# Altium PCB Main.PcbDoc
Units mil, origin at the board's own origin, x right, y up, seen from the top; angles counter-clockwise.
Board outline 5000 x 3500 mil, 2 copper layers (Top Layer, Bottom Layer), stack 62.8 mil thick; 27 components, 29 nets, 215 pads, 221 vias.
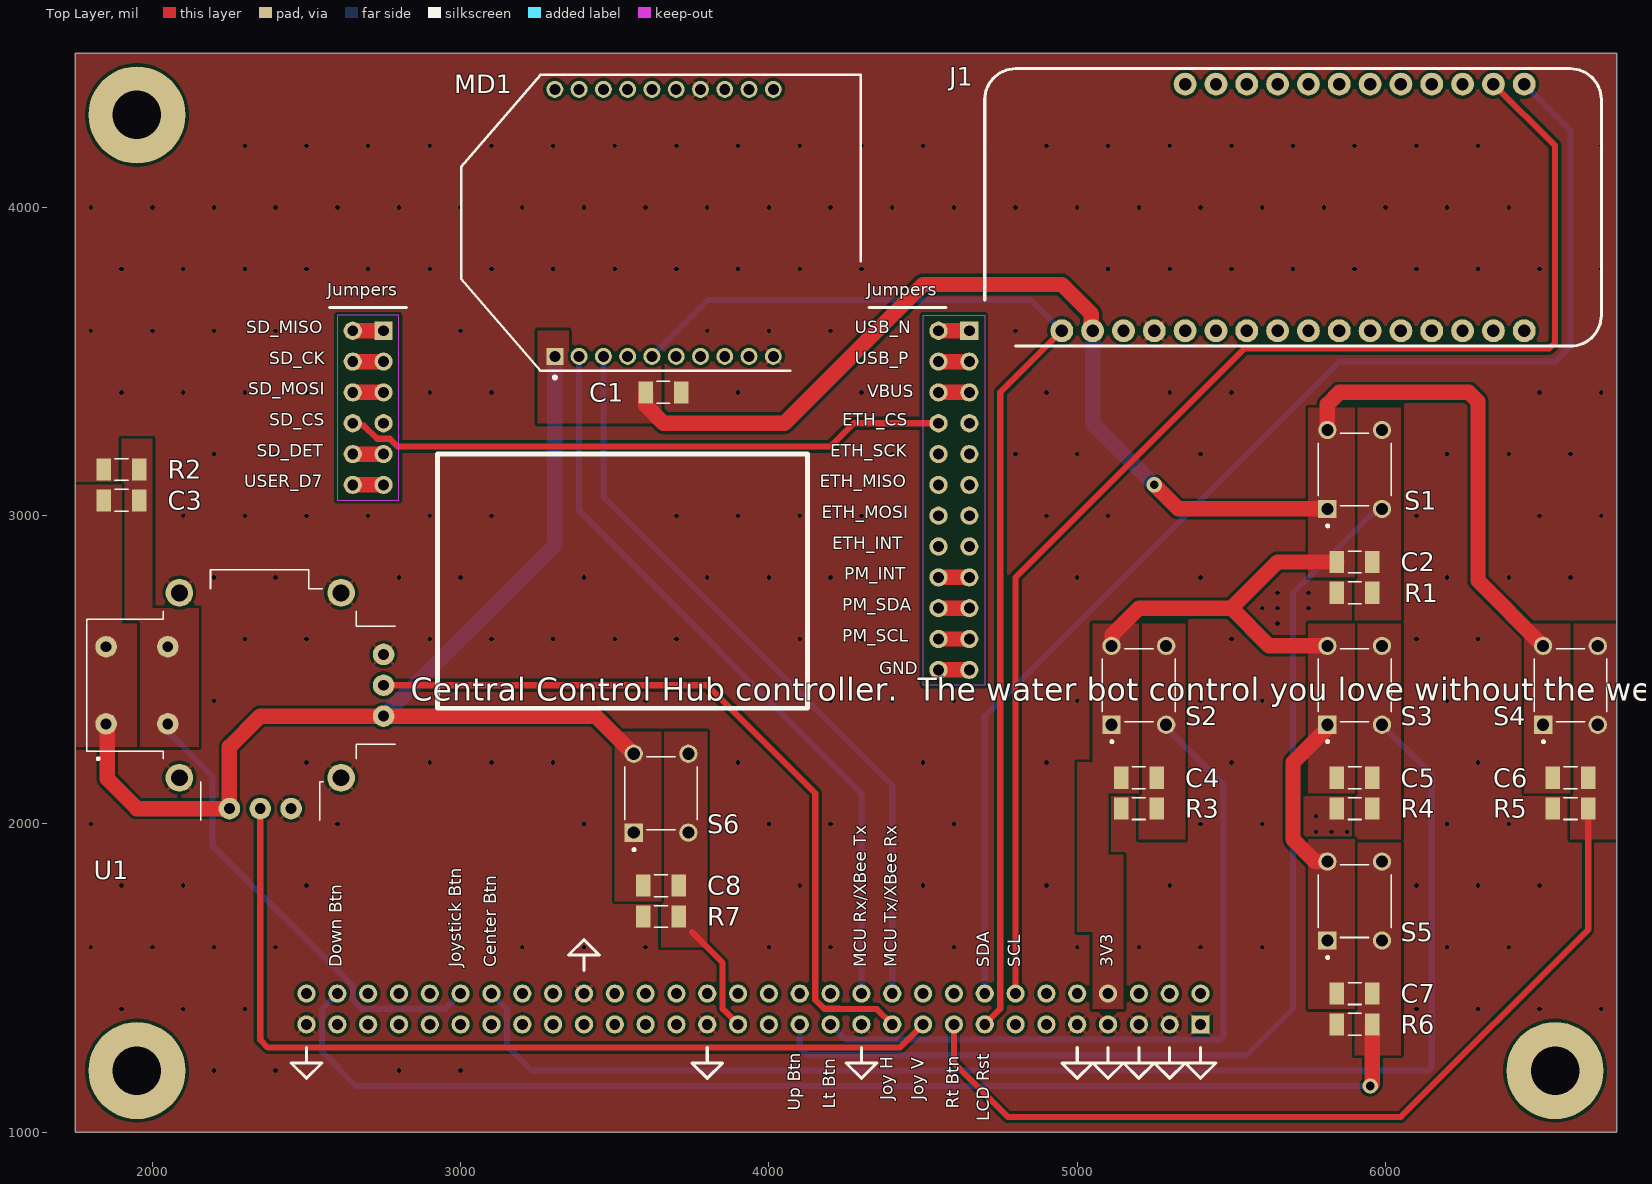
[diagram p0: Top Layer view]
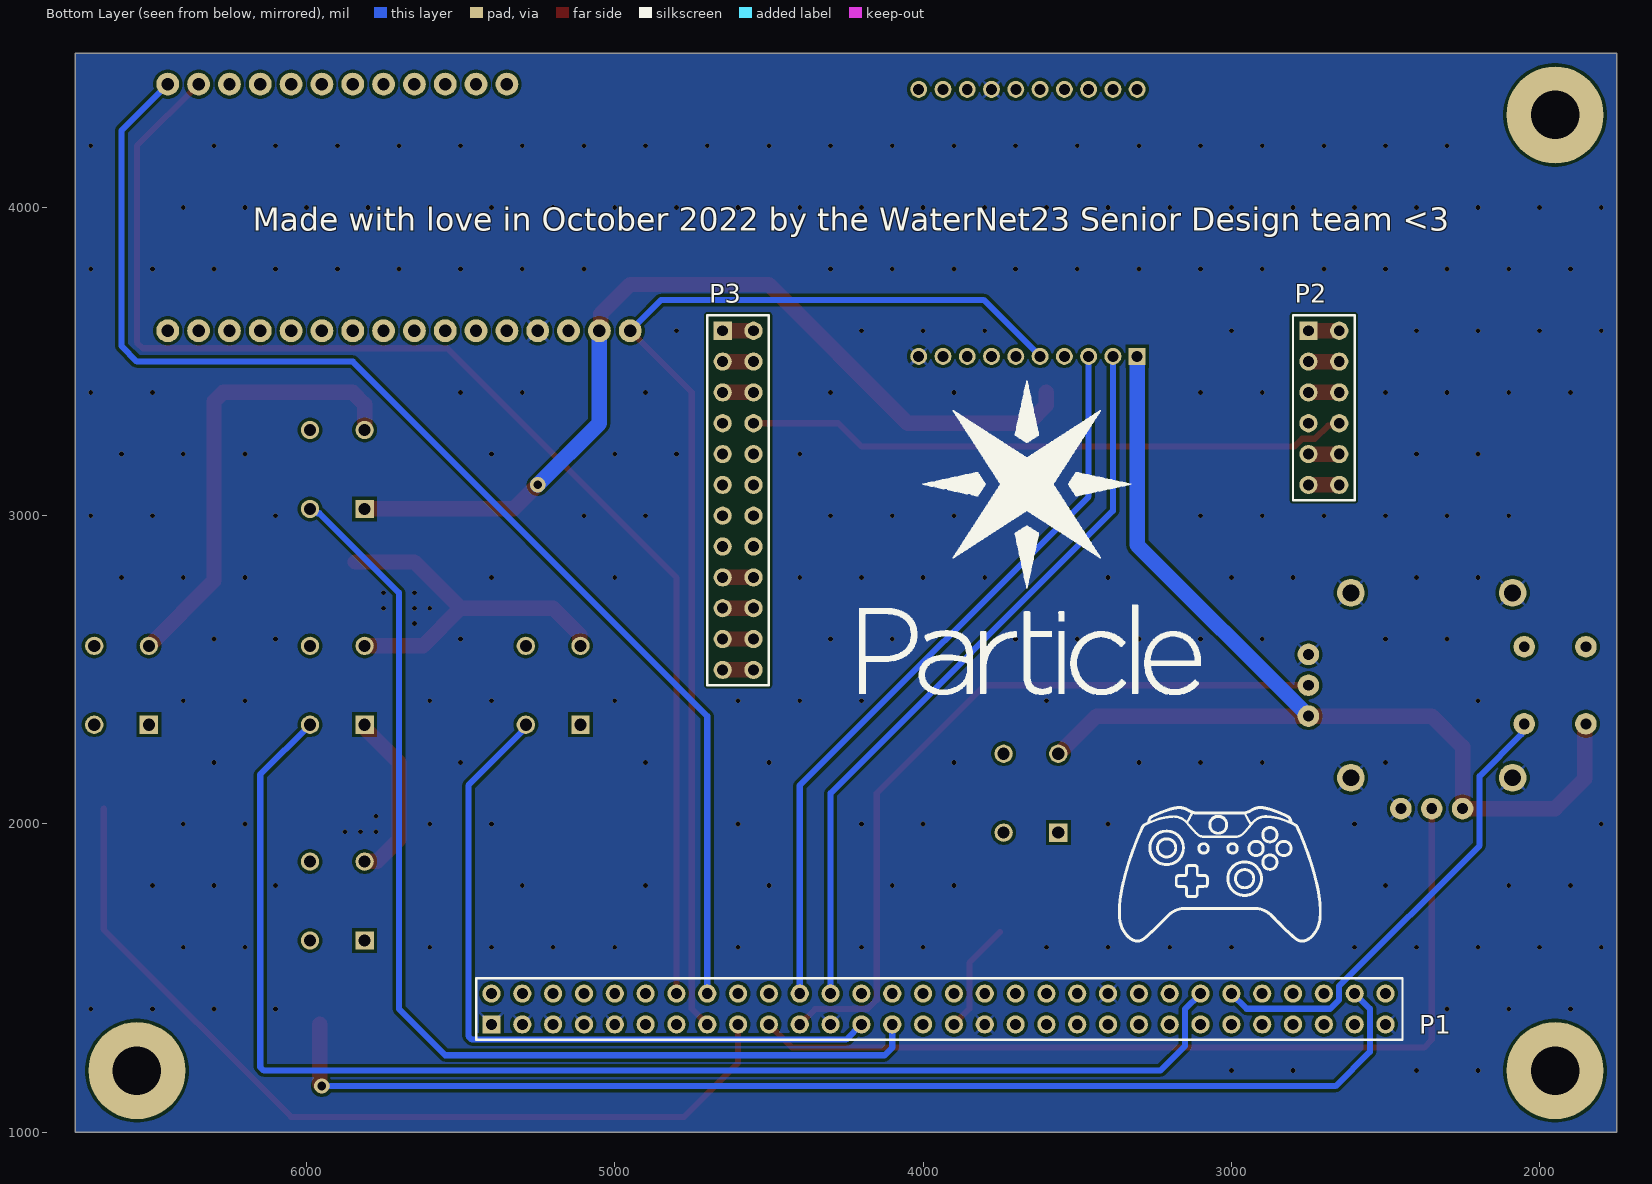
[diagram p1: Bottom Layer view, seen from below]

## Layer stack, top to bottom
Top Solder: solder mask 1, Solder Resist, Dk 3.5
Top Layer: signal copper 1.4
Dielectric 1: dielectric 60, FR-4, Dk 4.8
Bottom Layer: signal copper 1.4
Bottom Solder: solder mask 1, Solder Resist, Dk 3.5

## Board outline
1750,1000 1750,4500 6750,4500 6750,1000

## Design rules (kind name [scope] priority, off if disabled: settings)
Clearance [All] p1: gap=10 ignorepadtopadclearanceinfootprint=FALSE
Height [All] p1: minheight=0 maxheight=2000 prefheight=500
HoleSize [All] p1: absolutevalues=TRUE maxlimit=248.03 minlimit=7.87 maxpercent=80.000 minpercent=20.000
HoleToHoleClearance [All] p1: gap=19.68 allowstackedmicrovias=TRUE
PolygonConnect PolygonConnect_1 [InNet('GND')] p1: thpad.connectstyle=Relief thpad.reliefconductorwidth=10 thpad.reliefentries=4 thpad.polygonreliefangle="45 Angle" thpad.airgapwidth=10 smdpad.connectstyle=Direct smdpad.reliefconductorwidth=20 smdpad.reliefentries=4 smdpad.polygonreliefangle="45 Angle" smdpad.airgapwidth=10 via.connectstyle=Direct via.reliefconductorwidth=20 via.reliefentries=4 via.polygonreliefangle="45 Angle" via.airgapwidth=10
PolygonConnect [All] p2: connectstyle=Direct reliefconductorwidth=20 reliefentries=4 polygonreliefangle="45 Angle" airgapwidth=10
RoutingVias [All] p1: holewidth=15.75 width=50 viastyle="Through Hole" minholewidth=7.87 minwidth=5.12 maxholewidth=248.03 maxwidth=393.7
SilkToSilkClearance [All] p1: silktosilkclearance=6
SilkToSolderMaskClearance [IsPad] p1: minsilkscreentomaskgap=6 clearancetoexposedcopper=TRUE
SolderMaskExpansion [All] p1: expansion=4 istentingtop=FALSE
Width [All] p1: maxlimit=100 minlimit=10 preferedwidth=20
25 further rules are at their usual default settings.

## Components (designator, comment, footprint, x,y, rotation, side; value= is the part's Value field where it differs from the comment)
C1 "Capacitor" "1206 Capacitor" 3657.48,3400 r180 top value=1uF
C2 "Capacitor" "1206 Capacitor" 5900,2850 r180 top value=1uF
C3 "Capacitor" "1206 Capacitor" 1900,3050 r180 top value=1uF
C4 "Capacitor" "1206 Capacitor" 5200,2150 r180 top value=1uF
C5 "Capacitor" "1206 Capacitor" 5900,2150 r180 top value=1uF
C6 "Capacitor" "1206 Capacitor" 6600,2150 r180 top value=1uF
C7 "Capacitor" "1206 Capacitor" 5900,1450 r180 top value=1uF
C8 "Capacitor" "1206 Capacitor" 3650,1800 r180 top value=1uF
J1 "Feather_Header" Feather_OLED 5700,4000 r0 top
MD1 "XBP9B-DMUTB002" FP-XBP9B-DMUTB002-MFG 3650,3950 r90 top
P1 "B-Series SOM Connector" HDR2X30 5400,1350 r180 bottom
P2 "Left Header" HDR2X6 2750,3600 r270 bottom
P3 "Right Header" HDR2X12 4650,3600 r270 bottom
R1 "Resistor" "1206 Resistor" 5900,2750 r0 top value=10k
R2 "Resistor" "1206 Resistor" 1900,3150 r0 top value=10k
R3 "Resistor" "1206 Resistor" 5200,2050 r0 top value=10k
R4 "Resistor" "1206 Resistor" 5900,2050 r0 top value=10k
R5 "Resistor" "1206 Resistor" 6600,2050 r0 top value=10k
R6 "Resistor" "1206 Resistor" 5900,1350 r0 top value=10k
R7 "Resistor" "1206 Resistor" 3650,1700 r0 top value=10k
S1 "Button" "Makerspace Button" 5900,3150 r90 top
S2 "Button" "Makerspace Button" 5200,2450 r90 top
S3 "Button" "Makerspace Button" 5900,2450 r90 top
S4 "Button" "Makerspace Button" 6600,2450 r90 top
S5 "Button" "Makerspace Button" 5900,1750 r90 top
S6 "Button" "Makerspace Button" 3650,2100 r90 top
U1 "Joystick" XDCR_COM-09032 2350,2450 r90 top locked

## Footprints (in the part's own frame and the unit in brackets; to place one, negate y for a bottom-side part, rotate by r counter-clockwise, add the part's x,y. Pads: shape width x height; smd on the part's side, far side on the other; paste and mask are expansions set on the pad)
"1206 Capacitor" [mm]
  rect 1.2x1.82 smd: 1(-1.46,0) 2(1.46,0)
  silkscreen extent -0.54,-0.9 0.54,0.9, body extent -1.6,-0.9 1.6,0.9, height 1.61
"1206 Resistor" [mm]
  rect 1.2x1.82 smd: 1(-1.46,0) 2(1.46,0)
  silkscreen extent -0.54,-0.9 0.54,0.9, body extent -1.55,-0.77 1.55,0.77, height 0.56
Feather_OLED [mil]
  round 74 hole 40: 1(-750,-400) 2(-650,-400) 3(-550,-400) 4(-450,-400) 5(-350,-400) 6(-250,-400) 7(-150,-400) 8(-50,-400) 9(50,-400) 10(150,-400) 11(250,-400) 12(350,-400) 13(450,-400) 14(550,-400) 15(650,-400) 16(750,-400) 17(750,400) 18(650,400) 19(550,400) 20(450,400) 21(350,400) 22(250,400) 23(150,400) 24(50,400) 25(-50,400) 26(-150,400) 27(-250,400) 28(-350,400)
  silkscreen extent -1000,-450 1000,450, body extent -1000,-450 1000,450, height 572
FP-XBP9B-DMUTB002-MFG [mm]
  rect 1.4x1.4 hole 0.9 paste-1000 mask+0: 1(-11,8.75)
  round 1.4 hole 0.9 paste-1000 mask+0: 2(-11,6.75) 3(-11,4.75) 4(-11,2.75) 5(-11,0.75) 6(-11,-1.25) 7(-11,-3.25) 8(-11,-5.25) 9(-11,-7.25) 10(-11,-9.25) 11(11,-9.25) 12(11,-7.25) 13(11,-5.25) 14(11,-3.25) 15(11,-1.25) 16(11,0.75) 17(11,2.75) 18(11,4.75) 19(11,6.75) 20(11,8.75)
  silkscreen extent -12.86,-16.47 12.19,16.47, body extent -12.29,-16.57 12.29,16.57, height 0.25
HDR2X6 [mm] "Connector; Header; 6x2 Position"
  rect 1.5x1.5 hole 0.9: 1(0,0)
  round 1.5 hole 0.9: 2(0,2.54) 3(2.54,0) 4(2.54,2.54) 5(5.08,0) 6(5.08,2.54) 7(7.62,0) 8(7.62,2.54) 9(10.16,0) 10(10.16,2.54) 11(12.7,0) 12(12.7,2.54)
  silkscreen extent -1.27,-1.27 13.97,3.81, body extent -1.52,-1.27 14.22,3.81, height 8.52
HDR2X12 [mm] "Connector; Header; 12x2 Position"
  rect 1.5x1.5 hole 0.9: 1(0,0)
  round 1.5 hole 0.9: 2(0,2.54) 3(2.54,0) 4(2.54,2.54) 5(5.08,0) 6(5.08,2.54) 7(7.62,0) 8(7.62,2.54) 9(10.16,0) 10(10.16,2.54) 11(12.7,0) 12(12.7,2.54) 13(15.24,0) 14(15.24,2.54) 15(17.78,0) 16(17.78,2.54) 17(20.32,0) 18(20.32,2.54) 19(22.86,0) 20(22.86,2.54) 21(25.4,0) 22(25.4,2.54) 23(27.94,0) 24(27.94,2.54)
  silkscreen extent -1.27,-1.27 29.21,3.81, body extent -1.52,-1.27 29.46,3.81, height 8.52
HDR2X30 [mm] "Connector; Header; 30x2 Position"
  rect 1.5x1.5 hole 0.9: 1(0,0)
  round 1.5 hole 0.9: 2(0,2.54) 3(2.54,0) 4(2.54,2.54) 5(5.08,0) 6(5.08,2.54) 7(7.62,0) 8(7.62,2.54) 9(10.16,0) 10(10.16,2.54) 11(12.7,0) 12(12.7,2.54) 13(15.24,0) 14(15.24,2.54) 15(17.78,0) 16(17.78,2.54) 17(20.32,0) 18(20.32,2.54) 19(22.86,0) 20(22.86,2.54) 21(25.4,0) 22(25.4,2.54) 23(27.94,0) 24(27.94,2.54) 25(30.48,0) 26(30.48,2.54) 27(33.02,0) 28(33.02,2.54) 29(35.56,0) 30(35.56,2.54) 31(38.1,0) 32(38.1,2.54) 33(40.64,0) 34(40.64,2.54) 35(43.18,0) 36(43.18,2.54) 37(45.72,0) 38(45.72,2.54) 39(48.26,0) 40(48.26,2.54) 41(50.8,0) 42(50.8,2.54) 43(53.34,0) 44(53.34,2.54) 45(55.88,0) 46(55.88,2.54) 47(58.42,0) 48(58.42,2.54) 49(60.96,0) 50(60.96,2.54) 51(63.5,0) 52(63.5,2.54) 53(66.04,0) 54(66.04,2.54) 55(68.58,0) 56(68.58,2.54) 57(71.12,0) 58(71.12,2.54) 59(73.66,0) 60(73.66,2.54)
  silkscreen extent -1.27,-1.27 75.06,3.81, body extent -1.27,-1.27 74.93,3.81, height 8.33
"Makerspace Button" [mm]
  rect 1.508x1.508 hole 1: 1(-3.25,2.25)
  round 1.508 hole 1: 2(3.25,2.25) 3(-3.25,-2.25) 4(3.25,-2.25)
  silkscreen extent -4.75,-3 3,3, body extent -5.5,-4.2 5.5,4.2, height 4.9
XDCR_COM-09032 [mil]
  round 70 hole 35.43: B1A(-125,500) B1A(125,500) B2A(-125,300) B2A(125,300)
  round 70 hole 35: H1(-100,-400) H2(0,-400) H3(100,-400) V1(-400,100) V2(-400,0) V3(-400,-100)
  round 90 hole 55: S1(-300,262.5) S2(-300,-262.5) S3(300,-262.5) S4(300,262.5)
  silkscreen extent -437,-437 374,563, body extent -525,-523 525,564, height 1191

## Part data
MD1: library part CMP-84319-000004-1, "RX TXRX MOD ISM < 1GHZ U.FL TH", Case/Package=Module, Current - Receiving=29mA, Current - Transmitting=215mA, Frequency=900MHz, Max Frequency=928MHz, Max Operating Temperature=85°C, Max Supply Voltage=3.6V, Min Frequency=902MHz, Min Operating Temperature=-40°C, Min Supply Voltage=2.4V, Output Power (dBm)=24dBm, Package Quantity=1, Data Rate=200Kbps, Interface=SPI, Memory Size=2KB, Number of Pins=20, Packaging=Bulk, Radiation Hardening=No, RAM Size=2KB, Sensitivity=-101dBm, Series=XBee-Pro™
P1: library part "Header 30X2", "Header, 30-Pin, Dual row", LatestRevisionDate=17-Jul-2002, LatestRevisionNote="Re-released for DXP Platform.", Publisher="Altium Limited"
P2: library part "Header 6X2", "Header, 6-Pin, Dual row", LatestRevisionDate=17-Jul-2002, LatestRevisionNote="Re-released for DXP Platform.", Publisher="Altium Limited"
P3: library part "Header 12X2", "Header, 12-Pin, Dual row", LatestRevisionDate=17-Jul-2002, LatestRevisionNote="Re-released for DXP Platform.", Publisher="Altium Limited"
S1 S2 S3 S4 S5 S6: library part TS02-66-170-BK-260-SCR-D, "6 x 6 mm, 17 mm Actuator Height, 260 gf, Black, Short Crimped, Through Hole, SPST, Tactile Switch", Package=None, Availability="In Stock", CUI_purchase_URL=https://www.cuidevices.com/product/switches/tactile-switches/ts02-series?utm_source=snapeda.com&utm_medium=referral&utm_campaign=snapedaBOM, MF="CUI Devices", MP=TS02-66-170-BK-260-SCR-D, Price=None, Purchase-URL=https://pricing.snapeda.com/search/part/TS02-66-170-BK-260-SCR-D/?ref=eda
U1: library part COM-09032, "Thumb Joystick", Package=None, Availability=Unavailable, MP=COM-09032, Price=None
C1 C2 C3 C4 C5 C6 C7 C8: SimulationGenericComponent=True
R1 R2 R3 R4 R5 R6 R7: SimulationGenericComponent=True, TC1=0, TC2=0

## Free pads (board coordinates)
  round 314.96 hole 157.48: MECH(1950,1200) MECH(1950,4300) MECH(6550,1200)

## Via types
v1: diameter 15.75, hole 15.75, Top Layer to Bottom Layer, 219 vias
v2: diameter 50, hole 28, Top Layer to Bottom Layer, 2 vias

## Nets (pads, with @x,y where several pads share a name; then routed paths per layer and width w, separated by ;. In a path a pad name is that pad's centre, name@x,y a point inside that pad or via, vN(x,y) a via of type N, cw(c..) or ccw(c..) an arc to the next point about the centre after c; other vN are vias at no path point)
3V3: C1.2 C2.2 C3.2 C4.2 C5.2 C6.2 C7.2 C8.2 J1.2 MD1.1 P1.8 S1.1 S1.2 S2.1 S2.2 S3.1 S3.2 S4.1 S4.2 S5.1 S5.2 S6.1 S6.2 U1.B1A U1.H1 U1.V1 | length 9852.3
  Top Layer w50: U1.B1A@1850,2325 1853.83,2321.17 1853.83,2146.17 1950,2050 U1.V1 2250,2250 2350,2350 3436.83,2350 3558.88,2227.95 S6.2 ; C1.2 3600,3358.46 3658.46,3300 4050,3300 4500,3750 4950,3750 5045.8,3654.2 5045.8,3604.2 J1.2 ; S2.2 5113.21,2579.75 5113.21,2613.21 5200,2700 5500,2700 ; v2(5250,3100) 5327.95,3022.05 S1.1 ; S5.2 5809.62,1879.75 5770.25,1879.75 5700,1950 5700,2200 5806.73,2306.73 5806.73,2317.36 S3.1 ; S3.2 5622.05,2577.95 5500,2700 ; S1.2 5811.42,3361.42 5850,3400 6270.71,3400 6300,3370.71 6300,2789.37 S4.2 ; C2.2 5650,2850 5500,2700
  Bottom Layer w50: U1.H1 3305.51,2905.51 MD1.1 ; J1.2 5050,3300 v2(5250,3100)
A0/Feather_RST_n: J1.1 MD1.5 P1.15 | length 3804.1
  Top Layer w20: P1.15 4750.47,1400.47 4750.47,3400.47 J1.1
  Bottom Layer w20: MD1.5@3620.47,3520.73 MD1.5 3803.54,3700 4850,3700 J1.1
A1/Right_Button: C6.1 P1.17 R5.2 S4.3 S4.4 | length 2899.1
  Top Layer w20: P1.17 4600,1225 4775,1050 6050,1050 6657.48,1657.48 R5.2
A2/Joystick_Vert: P1.19 U1.V2 | length 2941.4
  Top Layer w20: U1.V2 2350,1300 2375,1275 4425,1275 P1.19
A3/Joystick_Horiz: P1.21 U1.H2 | length 2498.1
  Top Layer w20: U1.H2 3800,2450 4150.47,2099.53 4150.47,1429.48 4179.48,1400.47 4227.5,1400.47 4228.44,1399.53 4350.47,1399.53 P1.21
A4/Left_Button: C4.1 P1.25 R3.2 S2.3 S2.4 | length 2387.4
  Bottom Layer w20: P1.25 4249.53,1300.47 5463.28,1300.47 5475,1312.19 5475,2125 5288.58,2311.42 S2.3
A5/Up_Button: C2.1 P1.27 R1.2 S1.3 S1.4 | length 3498.8
  Bottom Layer w20: P1.27 4100,1275 4125,1250 5550,1250 5700.43,1400.43 5700.43,2750.43 5958.11,3008.11 5963.99,3008.11 5977.93,3022.05 S1.3
A7/Stop_Button: C8.1 P1.31 R7.2 S6.3 S6.4 | length 362.1
  Top Layer w20: 3750,1650 3849.53,1550.47 3849.53,1400.47 P1.31
D7/Down_Button: C7.1 P1.58 R6.2 S5.3 S5.4 | length 3858
  Top Layer w50: v2(5950,1150) 5957.48,1157.48 R6.2
  Bottom Layer w20: P1.58 2550.47,1400.47 2550.47,1261.24 2661.72,1150 v2(5950,1150)
D22/Center_Button: C5.1 P1.48 R4.2 S3.3 S3.4 | length 4405.9
  Bottom Layer w20: P1.48 3150.47,1399.53 3150.47,1279.48 3229.96,1200 6138.28,1200 6150,1211.72 6150,2160.63 S3.3
D23/Joystick_Button: C3.1 P1.50 R2.2 U1.B2A | length 1526.3
  Bottom Layer w20: U1.B2A@2050,2325 2059.57,2315.43 2059.57,2290.43 2195,2155 2195,1930 2650.47,1474.53 2650.47,1429.48 2679.49,1400.47 2950.47,1400.47 P1.50
GND: C1.1 J1.4 MD1.10 MD1.14 P1.1 P1.3 P1.5 P1.7 P1.9 P1.23 P1.33 P1.42 P1.59 R1.1 R2.1 R3.1 R4.1 R5.1 R6.1 R7.1 U1.H3 U1.S1 U1.S2 U1.S3 U1.S4 U1.V3
  other v1: 2200,1200 2400,1200 2800,1200 3000,1200 1900,1400 2100,1400 2300,1400 6100,1400 6300,1400 6500,1400 6700,1400 1800,1600 2000,1600 2200,1600 2400,1600 2600,1600 3000,1600 3200,1600 3400,1600 3600,1600 4000,1600 4200,1600 4600,1600 5000,1600 5200,1600 5400,1600 5600,1600 6200,1600 6400,1600 1900,1800 2100,1800 2500,1800 3900,1800 4100,1800 4500,1800 4900,1800 5300,1800 6100,1800 6300,1800 6500,1800 5775,1975 5825,1975 5875,1975 1800,2000 2600,2000 3400,2000 4000,2000 4200,2000 4600,2000 5400,2000 5600,2000 6200,2000 6400,2000 5775,2025 2500,2200 2900,2200 3100,2200 3300,2200 3900,2200 4500,2200 4900,2200 5500,2200 6300,2200 2200,2400 3600,2400 4200,2400 4400,2400 4600,2400 5000,2400 5400,2400 5600,2400 6200,2400 6400,2400 2300,2600 2500,2600 2900,2600 3100,2600 3300,2600 3500,2600 3700,2600 4100,2600 4300,2600 5500,2600 6100,2600 6300,2600 5650,2650 5600,2700 5650,2700 5750,2700 5650,2750 5750,2750 2200,2800 2400,2800 2800,2800 3000,2800 3400,2800 3800,2800 4000,2800 4200,2800 4400,2800 5000,2800 5400,2800 6200,2800 6400,2800 6600,2800 2100,3000 2300,3000 2500,3000 2700,3000 2900,3000 3100,3000 3700,3000 3900,3000 4100,3000 4300,3000 4900,3000 5100,3000 6100,3000 6500,3000 6700,3000 2200,3200 2400,3200 4400,3200 4800,3200 5000,3200 5400,3200 6200,3200 6400,3200 6600,3200 1900,3400 2100,3400 2300,3400 2500,3400 2900,3400 3100,3400 3900,3400 4300,3400 4900,3400 5300,3400 5500,3400 6500,3400 6700,3400 1800,3600 2000,3600 2200,3600 2400,3600 3000,3600 3800,3600 4000,3600 4200,3600 4800,3600 1900,3800 2100,3800 2300,3800 2500,3800 2700,3800 2900,3800 3100,3800 3300,3800 3500,3800 3700,3800 3900,3800 4100,3800 4300,3800 5100,3800 5300,3800 5500,3800 5700,3800 5900,3800 6100,3800 6300,3800 6500,3800 6700,3800 1800,4000 2000,4000 2200,4000 2400,4000 2600,4000 2800,4000 3000,4000 3200,4000 3400,4000 3600,4000 3800,4000 4000,4000 4200,4000 4400,4000 4600,4000 4800,4000 5000,4000 5200,4000 5400,4000 5600,4000 5800,4000 6000,4000 6200,4000 6400,4000 2300,4200 2500,4200 2700,4200 2900,4200 3100,4200 3300,4200 3500,4200 3700,4200 3900,4200 4100,4200 4300,4200 4500,4200 4700,4200 4900,4200 5100,4200 5300,4200 5500,4200 5700,4200 5900,4200 6100,4200 6300,4200 6700,4200
MCU_Rx: MD1.2 P1.24 | length 2446.2
  Bottom Layer w20: MD1.2 3384.25,3015.75 4300,2100 P1.24
MCU_Tx: MD1.3 P1.22 | length 2455.1
  Bottom Layer w20: MD1.3 3462.99,3062.01 4400,2125 P1.22
NetP2_1: P2.1 P2.2 | length 100
  Top Layer w50: P2.2 P2.1
NetP2_3: P2.3 P2.4 | length 100
  Top Layer w50: P2.4 P2.3
NetP2_5: P2.5 P2.6 | length 100
  Top Layer w50: P2.6 P2.5
NetP2_8: P2.8 P3.8 | length 1962.1
  Top Layer w20: P2.8 2657.47,3292.53 2686.49,3292.53 2729.49,3249.53 2770.51,3249.53 2795.04,3225 4200,3225 4275,3300 P3.8
NetP2_9: P2.9 P2.10 | length 100
  Top Layer w50: P2.10 P2.9
NetP2_11: P2.11 P2.12 | length 100
  Top Layer w50: P2.12 P2.11
NetP3_1: P3.1 P3.2 | length 100
  Top Layer w50: P3.2 P3.1
NetP3_3: P3.3 P3.4 | length 100
  Top Layer w50: P3.4 P3.3
NetP3_5: P3.5 P3.6 | length 100
  Top Layer w50: P3.6 P3.5
NetP3_17: P3.17 P3.18 | length 100
  Top Layer w50: P3.18 P3.17
NetP3_19: P3.19 P3.20 | length 100
  Top Layer w50: P3.20 P3.19
NetP3_21: P3.21 P3.22 | length 100
  Top Layer w50: P3.22 P3.21
NetP3_23: P3.23 P3.24 | length 100
  Top Layer w50: P3.24 P3.23
SCL: J1.18 P1.14 | length 4336.6
  Top Layer w20: P1.14 4800,2800 5543,3543 6531.28,3543 6550,3561.72 6550,4200 J1.18
SDA: J1.17 P1.16 | length 4209.2
  Bottom Layer w20: P1.16 4700,2350 5850,3500 6550,3500 6600,3550 6600,4250 J1.17
pads on no net: J1.3 J1.5 J1.6 J1.7 J1.8 J1.9 J1.10 J1.11 J1.12 J1.13 J1.14 J1.15 J1.16 J1.19 J1.20 J1.21 J1.22 J1.23 J1.24 J1.25 J1.26 J1.27 J1.28 MD1.4 MD1.6 MD1.7 MD1.8 MD1.9 MD1.11 MD1.12 MD1.13 MD1.15 MD1.16 MD1.17 MD1.18 MD1.19 MD1.20 P1.2 P1.4 P1.6 P1.10 P1.11 P1.12 P1.13 P1.18 P1.20 P1.26 P1.28 P1.29 P1.30 P1.32 P1.34 P1.35 P1.36 P1.37 P1.38 P1.39 P1.40 P1.41 P1.43 P1.44 P1.45 P1.46 P1.47 P1.49 P1.51 P1.52 P1.53 P1.54 P1.55 P1.56 P1.57 P1.60 P2.7 P3.7 P3.9 P3.10 P3.11 P3.12 P3.13 P3.14 P3.15 P3.16

## Polygon pours and split planes (outlines as drawn)
GND on Top Layer "GND_L01_P021" (solid, pour order 21): 6750,4500 1750,4500 1750,1000 6750,1000
3V3 on Top Layer "3V3_L01_P000" (solid, pour order 0): 3650,2300 3500,2300 3500,1750 3650,1750
A7/Stop_Button on Top Layer "A7/STOP_BUTTON_L01_P001" (solid, pour order 1): 3800,2300 3650,2300 3650,1600 3800,1600
3V3 on Top Layer "3V3_L01_P020" (solid, pour order 20): 5050,1400 5150,1400 5150,1900 5100,1900 5100,2200 5000,2200 5000,1650 5050,1650
3V3 on Top Layer "3V3_L01_P016" (solid, pour order 16): 3650,3300 3650,3500 3350,3500 3350,3600 3250,3600 3250,3300
3V3 on Top Layer "3V3_L01_P003" (solid, pour order 3): 5900,2650 5750,2650 5750,2100 5900,2100
3V3 on Top Layer "3V3_L01_P002" (solid, pour order 2): 5200,2650 5050,2650 5050,2100 5200,2100
D23/Joystick_Button on Top Layer "D23/JOYSTICK_BUTTON_L01_P019" (solid, pour order 19): 1950,2250 2150,2250 2150,2700 2000,2700 2000,3250 1900,3250 1900,2675 1925,2650 1950,2650
3V3 on Top Layer "3V3_L01_P017" (solid, pour order 17): 1950,2250 1950,2650 1900,2650 1900,3100 1750,3100 1750,2250
3V3 on Top Layer "3V3_L01_P005" (solid, pour order 5): 6600,2650 6450,2650 6450,2100 6600,2100
3V3 on Top Layer "3V3_L01_P004" (solid, pour order 4): 5900,1950 5750,1950 5750,1400 5900,1400
3V3 on Top Layer "3V3_L01_P006" (solid, pour order 6): 5900,3350 5750,3350 5750,2800 5900,2800
A5/Up_Button on Top Layer "A5/UP_BUTTON_L01_P015" (solid, pour order 15): 6050,3350 5900,3350 5900,2650 6050,2650
D7/Down_Button on Top Layer "D7/DOWN_BUTTON_L01_P012" (solid, pour order 12): 6050,1950 5900,1950 5900,1250 6050,1250
A1/Right_Button on Top Layer "A1/RIGHT_BUTTON_L01_P009" (solid, pour order 9): 6750,2650 6600,2650 6600,1950 6750,1950
D22/Center_Button on Top Layer "D22/CENTER_BUTTON_L01_P008" (solid, pour order 8): 6050,2650 5900,2650 5900,1950 6050,1950
A4/Left_Button on Top Layer "A4/LEFT_BUTTON_L01_P007" (solid, pour order 7): 5350,2650 5200,2650 5200,1950 5350,1950
GND on Bottom Layer "GND_L02_P018" (solid, pour order 18): 6750,4500 1750,4500 1750,1000 6750,1000

## Keep-outs
Keep-Out Layer:
  region: 4500,3650 4700,3650 4700,2450 4500,2450
  region: 2800,3050 2800,3650 2600,3650 2600,3050

## Silkscreen, mask and mechanical layers (free items; w line width, h text height)
Top Overlay:
  lines w10: 2500,1225 2500,1275 ; 2575,3675 2825,3675 ; 3400,1525 3400,1575 ; 3800,1225 3800,1275 ; 4300,1225 4300,1275 ; 4325,3675 4575,3675 ; 5000,1225 5000,1275 ; 5100,1225 5100,1275 ; 5200,1225 5200,1275 ; 5300,1225 5300,1275 ; 5400,1225 5400,1275 ; 5050,1225 5100,1175 5150,1225 ; 5050,1225 5075,1225 5150,1225 ; 5050,1225 5000,1175 4950,1225 4975,1225 5050,1225 ; 5150,1225 5200,1175 5250,1225 ; 5150,1225 5175,1225 5250,1225 ; 5250,1225 5300,1175 5350,1225 ; 5250,1225 5275,1225 5350,1225 ; 5350,1225 5400,1175 5450,1225 5375,1225 5350,1225 ; 2450,1225 2500,1175 2550,1225 2475,1225 2450,1225 ; 3350,1575 3425,1575 3450,1575 3400,1625 3350,1575 ; 3750,1225 3800,1175 3850,1225 3775,1225 3750,1225 ; 4250,1225 4300,1175 4350,1225 4275,1225 4250,1225
  lines w15: 2925,2375 4125,2375 4125,3200 2925,3200 2925,2375
  text "Jumpers" at 2566.71,3713.33 h40
  text "Jumpers" at 4316.71,3713.33 h40
  text "SD_MISO" at 2305.08,3591.66 h40
  text "USB_N" at 4278.39,3591.66 h40
  text "SD_CK" at 2378.39,3491.66 h40
  text "USB_P" at 4278.39,3491.66 h40
  text "SD_MOSI" at 2311.75,3391.66 h40
  text "VBUS" at 4318.38,3385 h40
  text "SD_CS" at 2378.39,3291.66 h40
  text "ETH_CS" at 4238.41,3291.66 h40
  text "SD_DET" at 2338.41,3191.66 h40
  text "ETH_SCK" at 4198.42,3191.66 h40
  text "USER_D7" at 2298.42,3091.66 h40
  text "ETH_MISO" at 4165.1,3091.66 h40
  text "ETH_MOSI" at 4171.76,2991.66 h40
  text "ETH_INT" at 4205.08,2891.66 h40
  text "PM_INT" at 4245.07,2791.66 h40
  text "PM_SDA" at 4238.41,2691.66 h40
  text "PM_SCL" at 4238.41,2591.66 h40
  text "GND" at 4358.37,2485 h40
  text "Central Control Hub controller.  The water bot control you love without the web interface!" at 2837.59,2400 h75
  text "Down Btn" at 2615,1535 h40 r90
  text "Joystick Btn" at 3001.67,1535 h40 r90
  text "Center Btn" at 3115,1535 h40 r90
  text "MCU Rx/XBee Tx" at 4315,1535 h40 r90
  text "MCU Tx/XBee Rx" at 4415,1535 h40 r90
  text "SDA" at 4715,1535 h40 r90
  text "SCL" at 4815,1535 h40 r90
  text "3V3" at 5115,1535 h40 r90
  text "Joy H" at 4401.67,1103.39 h40 r90
  text "Joy V" at 4501.67,1103.39 h40 r90
  text "Lt Btn" at 4215,1076.74 h40 r90
  text "Rt Btn" at 4615,1076.74 h40 r90
  text "Up Btn" at 4101.67,1070.07 h40 r90
  text "LCD Rst" at 4715,1035 h40 r90
Bottom Overlay:
  drawing of 27 lines, arcs and shapes, not listed
  text "Made with love in October 2022 by the WaterNet23 Senior Design team <3" at 6175,3925 h75
Mechanical 15:
  lines w10: 1750,1050 ccw(c1800,1050) 1800,1000 6700,1000 ccw(c6700,1050) 6750,1050 6750,4450 ccw(c6700,4450) 6700,4500 1800,4500 ccw(c1800,4450) 1750,4450 1750,1050